# Altium PCB lps_regulator_rev_12.PcbDoc (part 2 of 2)
Units mil, origin at the board's own origin, x right, y up, seen from the top; angles counter-clockwise.
Board outline 5361 x 2466 mil, 2 copper layers (Top Layer, Bottom Layer); 131 components, 55 nets, 348 pads, 196 vias.
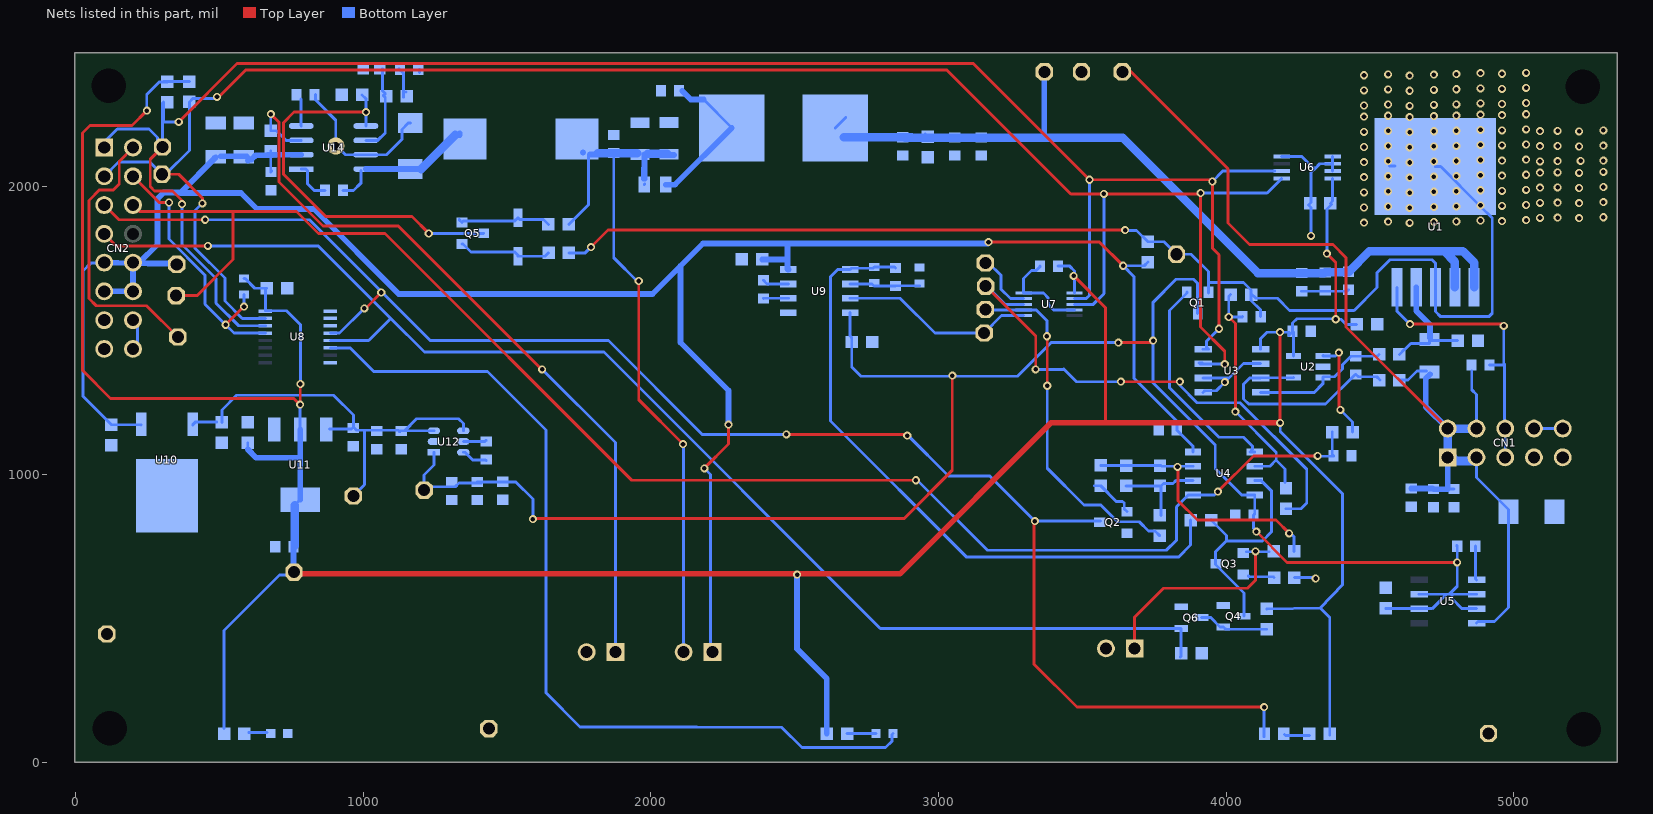
[diagram p2: the nets of this part, all layers, seen from the top]

## Via types
v1: diameter 28, hole 16, Top Layer to Bottom Layer, 196 vias

## Nets (pads, with @x,y where several pads share a name; then routed paths per layer and width w, separated by ;. In a path a pad name is that pad's centre, name@x,y a point inside that pad or via, vN(x,y) a via of type N, cw(c..) or ccw(c..) an arc to the next point about the centre after c; other vN are vias at no path point)
3V3: 3V3.1 C2.1 C7.1 C14.1 C15.1 C16.1 C23.1 C28.1 R6.1 R7.1 R15.2 R19.1 R25.1 R28.1 R31.1 U2.5 U3.5 U6.8 U7.1 U8.16 U11.2 U11.4 | length 11907.7
  Top Layer w10: v1(248,2265) 197,2214 50,2214 24,2188 24,1363 122,1265 759,1265 v1(781,1243) 781.5,1243.5 781.5,1314.5 v1(782,1315) ; v1(3470,1691) 3580,1581 3580,1182.12 ; 3580,1180 3580,1182.12 ; 3582,1180.12 3580,1182.12 ; v1(4187.15,1495) 4187.15,1180.85 v1(4187.88,1180.12) ; v1(4350,1768) 4381,1737 v1(4381,1540)
  Top Layer w20: 3V3.1@760,661 766,655 2866,655 3391,1180 3580,1180 ; 3582,1180.12 v1(4187.88,1180.12)
  Bottom Layer w10: v1(248,2265) 248,2321.12 292.31,2365.43 R6.1@319,2365.43 ; R6.1@306,2366.43 R7.1@396,2366.43 ; R25.1@516.57,118 516.57,458.57 709,651 750,651 3V3.1@760,661 3V3.1@757.5,663.5 ; R15.2@586,1681.56 589.94,1681.56 623.5,1648 C16.1@664.57,1648 661,1644.43 661,1569.57 733.43,1569.57 782,1521 v1(782,1315) ; 599,1088 C23.1@599,1110.57 ; C28.1@757.5,749 762,753.5 C28.1@770.21,761.72 ; U11.4@762,893.95 U11.4@781,912.95 ; 778,1059 781,1062 ; U11.2@781,1157.05 v1(781,1243) ; C15.1@3415.38,1724.56 3456.32,1724.56 3472.88,1708 U7.1@3472.88,1631.37 ; U3.5@4120,1436 4120,1473 4142,1495 v1(4187.15,1495) 4218.29,1495 4218.29,1483.31 4231.01,1496.03 C14.1@4231.01,1498 ; R28.1@4141,533.43 4327.43,536.43 4405,617.45 4405,933 4187.88,1150.12 v1(4187.88,1180.12) ; U2.5@4234,1412.4 4234,1495.01 C14.1@4231.01,1498 ; 4329.93,533.93 4360,503.87 R19.1@4360,100 R19.1@4360,94 ; v1(4350,1768) 4350,1923.43 4366,1939.43 C7.1@4362.43,1943 4370.17,1950.73 U6.8@4370.17,2029.41 ; C2.1@4453.57,1522 4417.26,1522 4399.26,1540 v1(4381,1540) 4379,1542 4246,1542 4231.01,1527.01 C14.1@4231.01,1498
  Bottom Layer w20: 599,1088 628,1059 778,1059 ; 3V3.1@757.5,663.5 C28.1@757.5,749 ; U11.4@781,912.95 781,1062 U11.2@781,1157.05 ; v1(2508.5,652.5) 2508.5,394.5 2611.57,291.43 R31.1@2611.57,100
  Bottom Layer w30: C28.1@762,753.5 U11.4@762,893.95
+5V0: +5V0.1 C21.1 C22.1 C25.1 C27.1 U10.3 U11.3 U12.3 U12.4 | length 1542.6
  Bottom Layer w10: U10.3@407.9,1173.09 418.3,1183.5 C21.1@491,1183.5 ; C21.1@509,1181.43 509,1225 560,1276 897,1276 966,1207 C22.1@966,1165.87 ; U11.3@883.55,1159.05 959.18,1159.05 C22.1@966,1165.87 ; +5V0.1@966,926 1005,965 1005,1154.4 ; C25.1@1121.6,1154.4 1005,1154.4 ; C25.1@1127,1149 1130.4,1152.4 C25.1@1144.4,1152.4 ; U12.3@1246,1152.4 C25.1@1144.4,1152.4 ; U12.4@1348.36,1152.4 1348.36,1177.64 1332,1194 1186,1194 C25.1@1144.4,1152.4 ; C22.1@966,1165.87 977.46,1154.4 1005,1154.4
+VIN_SW: +VIN_SW.1 C4.1 C18.1 C24.1 C33.1 C34.1 C35.1 CN2.5 CN2.6 CN2.13 CN2.14 CN3.1 R5.1 R29.1 U4.8 U9.8 U10.1 U14.2 | length 8141.4
  Top Layer w10: v1(2186,1022) 2270,1106 v1(2270,1174) ; v1(3174,1808) 3560,1808 v1(3642,1726)
  Top Layer w20: +VIN_SW.1@352,1744 +VIN_SW.1@357.75,1749.75
  Bottom Layer w10: CN2.5@100,1735 53,1735 26,1708 26,1272.43 C24.1@125,1173.43 228.03,1173.43 U10.1@228.37,1173.09 ; CN2.13@200,1735.03 CN2.13@200,1737 CN2.13@222,1737 ; +VIN_SW.1@352,1731 +VIN_SW.1@352,1734 ; C35.1@479,2104.94 C35.1@487,2104.94 ; R29.1@679,2124.57 679,2112 679,2110.5 679,2052.5 C33.1@680,2051.5 ; C33.1@682,2055.5 C33.1@682.5,2056 ; v1(2186,1022) 2208,1000 2208,389 CN3.1@2214,383 ; 2470,1748 2475,1743 ; R5.1@3728,1738.57 3715.43,1726 v1(3642,1726) 3679,1689 3679,1336 3828.5,1186.5 C4.1@3828.5,1155 3884.72,1098.78 U4.8@3884.72,1079
  Bottom Layer w20: CN2.6@100,1637 CN2.14@200,1637 200,1735.03 221.95,1734.59 252,1734 +VIN_SW.1@352,1734 ; CN2.5@100,1737 CN2.13@199.96,1735.03 ; CN2.13@222,1737 285,1800 285,1959 307,1981 366,1981 C35.1@488,2103 ; 365,1979 575,1979 631,1923 829,1923 1124,1628 2006,1628 2103,1725 ; C35.1@505,2107 C34.1@595,2107 ; C34.1@599.57,2092 C34.1@605.15,2097.59 ; C34.1@612.15,2095.59 627.07,2110.5 679,2110.5 R29.1@685,2110.5 ; R29.1@667.5,2112 679,2112 U14.2@785,2112 ; v1(2270,1174) 2270,1292 2103,1459 2103,1725 ; C18.1@2387,1748 2470,1748 ; U9.8@2478.43,1713 2476.81,1713 2475,1714.81 2475,1743 2475,1803 ; v1@3171,1803 2475,1803 ; 2103,1725 2181,1803 2475,1803
-5V0: -5V0.1 C5.1 C19.2 C26.1 C29.2 C50.1 Q1.3 R24.2 R32.1 U4.4 U5.2 U5.3 U5.6 U5.7 U9.4 U12.1 | length 6550.2
  Top Layer w10: v1(1590,845) 1593,848 1896,848 2881,848 3048,1015 v1(3048,1344) ; v1(3625,1459) 3739.62,1459 v1(3746.31,1465.69) ; v1(4105,802) 4212,695 v1(4803,695)
  Bottom Layer w10: U12.1@1246,1077.6 1246,1033 1212,999 -5V0.1@1212,946 1223.78,957.78 1320.28,957.78 1333,970.5 C26.1@1410.94,970.5 ; C26.1@1396,974.43 1397,974.43 1530.57,974.43 1590,915 v1(1590,845) ; U9.4@2693,1563 2693,1481.57 2698.57,1476 C19.2@2698.57,1461 2698.57,1374.43 2731,1342 3275,1342 3392,1459 v1(3625,1459) ; Q1.3@3901,1559.44 3901,1664 3886,1679 3826,1679 3746.31,1599.31 v1(3746.31,1465.69) 3746.31,1318.69 3962,1103 3962,1021 4054,929 U4.4@4099.28,929 4099.28,863.79 C5.1@4094.5,859 4094.5,812.5 v1(4105,802) ; C29.2@4555,535.57 4556.57,534 U5.6@4670.61,534 4716.17,534 4766.17,584 ; U5.7@4670.61,584 4766.17,584 ; R24.2@4801.56,753 R24.2@4803.11,751.44 4803.11,611.72 4775.39,584 ; U5.3@4870.61,534 4820.05,534 4784.61,569.44 4784.61,584 ; U5.2@4870.61,584 4784.61,584 ; 4766.17,584 4775.39,584 ; 4775.39,584 4784.61,584
/INT: CN2.10 R15.1 U8.13 | length 951.9
  Top Layer w10: CN2.10@200,2037 291,1946 v1(325,1946) ; v1(522,1521) 585,1584 v1(586,1584)
  Bottom Layer w10: v1(325,1946) 325,1818.56 450.5,1693.06 450.5,1592.5 v1(522,1521) 551.2,1491.8 U8.13@660,1491.8 ; v1(586,1584) R15.1@586,1626.44
/RST: CN2.9 TP1.1 | length 981.1
  Top Layer w10: CN2.9@200,2137 152,2089 152,2010 132,1990 83.86,1990 47,1953.14 47,1612 72,1587 247,1587 TP1.1@356,1478
Current_Limit: CN2.3 LED2.2 Q2.3 U8.4 | length 5634.5
  Top Layer w10: CN2.3@100,1937 151,1886 v1(451,1886) ; v1(1004,1578) 1008,1578 v1(1063,1633) ; v1(2471,1140) 2887,1140 v1(2891.5,1135.5) ; v1@3332,838 3332,341 3481,192 v1(4132,192)
  Bottom Layer w10: CN2.3@100,1937 CN2.3@109,1937 ; v1(451,1886) 813,1886 1233,1466 1853,1466 2179,1140 v1(2471,1140) ; U8.4@886,1491.8 917.8,1491.8 v1(1004,1578) ; v1@2893,1137 3035,995 3178,995 v1(3335,838) 3335.5,838.5 3512.54,838.5 3513.04,839 Q2.3@3563.32,839 ; 3513.04,838 3522,838 ; LED2.2@4131,89 4132,90 4132,190 4131,191 v1(4132,192)
Debug_LED: LED3.2 U8.6 | length 3100.8
  Bottom Layer w10: U8.6@886,1440.61 955,1440.61 1036.81,1358.81 1432.19,1358.81 1635.5,1155.5 1635.5,241.5 1754,123 2161,123 2162,122 2454,122 2525,51 2816,51 2839,74 2839,96.94 LED3.2@2842.06,100
GND: C2.2 C3.2 C4.2 C5.2 C6.2 C7.2 C8.2 C9.2 C10.2 C11.2 C12.2 C13.2 C14.2 C15.2 C16.2 C18.2 C19.1 C21.2 C22.2 C23.2 C24.2 C25.2 C26.2 C27.2 C28.2 C29.1 C32.2 C33.2 C34.2 C35.2 C37.2 C38.2 C39.2 C41.1 C42.2 C43.2 C44.2 C45.2 C46.2 C50.2 CN1.4 CN1.5 CN1.9 CN1.10 CN2.7 CN2.8 CN2.15 CN2.16 CN4.2 CN5.2 D1.1 D3.1 GND3.1 GND4.1 GND5.1 GND.1 LED1.2 Q2.2 Q4.2 Q6.2 R13.1 R18.2 R20.2 R22.2 R27.2 R32.2 U2.2 U3.1 U3.2 U3.6 U6.4 U6.5 U6.6 U6.7 U7.4 U7.10 U8.1 U8.2 U8.3 U8.8 U9.5 U10.4 U11.1 U12.2 U14.7 U14.9 | length 2171.2
  Top Layer w10: CN2.8@110,1436 CN2.8@112.44,1433.56
  Bottom Layer w10: CN2.16@215,1437 CN2.15@215,1537 ; C39.2@835,2321 835,2302 905,2232 U14.9@905,2142 908.64,2142 938.64,2112 U14.7@1009.41,2112 1081,2112 1135,2166 1135,2200.04 1156.96,2222 D3.1@1164.46,2222 ; R18.2@1195.43,2398.03 R18.2@1195.43,2409 ; C15.2@3352.39,1724.56 3352.39,1722.59 3339.67,1709.87 3323.76,1709.87 3295.72,1681.83 U7.10@3295.72,1631.37 3364.51,1631.37 3380.88,1615 3380.88,1592 3400.57,1572.32 U7.4@3472.88,1572.32 ; U3.1@3920,1286 3925.5,1291.5 3965.5,1291.5 v1(3995.5,1321.5) 4010,1336 ; U3.2@3920,1336 4010,1336 ; U3.6@4120,1386 4060,1386 4010,1336 ; U6.4@4193,2106.18 4262.82,2106.18 4303.7,2065.3 4310.3,2065.3 ; R22.2@4237.43,642 v1@4311,642 ; C10.2@4262.49,1637.5 4420,1637.5 C12.2@4425,1642.5 ; v1(4295,1830) 4295,1928.43 4286,1937.43 C7.2@4291.57,1943 4295,1946.43 4295,2050 4310.3,2065.3 ; U6.7@4370.17,2055 U6.5@4370.17,2080.59 ; U6.6@4370.17,2106.18 U6.5@4370.17,2080.59 ; CN1.9@5070,1160 CN1.10@5170,1160 ; 4310.3,2065.3 4325.59,2080.59 U6.5@4370.17,2080.59
  other v1: 4311,639
I2C_SCL: CN2.1 I2C_SCL.1 R6.2 U3.4 U6.2 U7.2 U8.14 | length 6626.7
  Top Layer w10: I2C_SCL.1@302.5,2138.57 260,2096.07 260,2001 275,1986 337,1986 372,1951 372,1942 v1(370.5,1940.5) v1@369,1939 ; v1(359,2226) 562,2429 3121,2429 v1(3525,2025) 3946,2025 v1(3952,2019) 3952,1787 3975,1764 v1(3975,1507)
  Bottom Layer w10: CN2.1@100,2135 CN2.1@101,2136 ; CN2.1@100,2137 100,2156 145.5,2201.5 255.5,2201.5 285.5,2171.5 285.5,2155.57 I2C_SCL.1@302.5,2138.57 302.5,2292.07 306,2295.57 306,2226 v1(359,2226) ; v1(370.5,1940.5) 370.5,1799.87 489,1681.37 489,1596 567.61,1517.39 U8.14@660,1517.39 ; U7.2@3472.88,1611.69 3513.45,1611.69 3519,1617.23 ; 3519.23,1617.46 3525,1623.23 v1(3525,2025) ; U3.4@3920,1436 3939,1436 3931,1444 3931,1463 v1(3975,1507) ; v1(3952,2019) 3988,2055 U6.2@4169,2055
I2C_SDA: CN2.2 I2C_SDA.1 R7.2 U3.3 U6.1 U7.3 U8.15 | length 6533.7
  Top Layer w10: I2C_SDA.1@301,2044 359,2044 441,1962 v1(441,1943) ; v1(492,2313) 498,2313 592,2407 3029,2407 3460,1976 v1(3575,1976) 3908,1976 v1(3911,1979) 3911,1513 3995,1429 v1(3995,1384)
  Bottom Layer w10: CN2.2@100,2037 150,2087 258,2087 I2C_SDA.1@301,2044 313,2044 396,2127 R7.2@396,2295.57 407.43,2307 486,2307 v1(492,2313) ; v1(441,1943) 416,1918 416,1787 520,1683 520,1603 580.02,1542.98 U8.15@660,1542.98 ; U7.3@3472.88,1592 3538,1592 3575,1629 v1(3575,1976) ; v1(3911,1979) 4142.59,1979 U6.1@4193,2029.41 ; U3.3@3920,1386 3917.5,1388.5 3905.5,1388.5 3910,1384 v1(3995,1384)
I_Sample: C6.1 CN2.11 I_sample.1 R11.2 U4.5 | length 5428.2
  Top Layer w10: CN2.11@200,1937 222,1915 548,1915 ; I_sample.1@350,1622 422,1622 548,1748 548,1915 ; v1(2921.5,980.5) 1933.5,980.5 1076,1838 845,1838 768,1915 548,1915 ; v1(3971,941) 4095,1065 v1(4318,1065)
  Bottom Layer w10: I_sample.1@348.5,1620.5 I_sample.1@350,1622 351.5,1623.5 I_sample.1@356.5,1623.5 ; I_sample.1@354,1616 359,1621 376,1621 371,1616 I_sample.1@359,1616 ; v1@2924,983 3170,737 3792,737 3827,772 3827,888.02 3867.98,929 U4.5@3884.72,929 3959,929 v1(3971,941) ; v1(4318,1065) 4318.97,1064.03 4373.01,1064.03 C6.1@4373.01,1066 4368.57,1070.44 R11.2@4368.57,1148
IA_TP: IA_TP.1 R17.1 U7.7 | length 1264.1
  Top Layer w10: IA_TP.1@3149.95,1561.07 IA_TP.1@3162.88,1574 ; IA_TP.1@3157,1576 IA_TP.1@3166.93,1585.93 ; v1(3377,1481) 3378,1480 v1(3378,1309)
  Bottom Layer w10: IA_TP.1@3162.88,1574 3164.57,1572.32 U7.7@3295.72,1572.32 3339.69,1572.32 3377,1535 v1(3377,1481) ; v1(3378,1309) 3378,1022 3506,894 3564,894 3622,836 3698,836 3729.78,804.22 3752.35,804.22 R17.1@3769,787.57
NetC1_1: C1.1 R4.1 R13.2 U9.2 | length 244.3
  Bottom Layer w10: U9.2@2693,1663 2769.22,1663 2776.72,1655.5 C1.1@2850.72,1655.5 2851.78,1656.57 R13.2@2933.72,1656.57
NetC17_1: C17.1 U12.5 | length 81.5
  Bottom Layer w10: U12.5@1348.36,1115 1423.57,1115 C17.1@1428,1119.43
NetC17_2: C17.2 U12.6 | length 91.7
  Bottom Layer w10: U12.6@1348.36,1077.6 1354.52,1077.6 1381.12,1051 1425.57,1051 C17.2@1428,1048.57
NetC30_1: C30.1 R16.1 R21.2 R30.2 U4.7 | length 953.6
  Top Layer w10: v1@3833,1032 3833,909 3900,842 4173,842 v1(4219,796)
  Bottom Layer w10: R30.2@3564,1032 3564.57,1031.43 C30.1@3652,1031.43 3774,1031.43 3776.43,1029 v1@3829,1029 ; v1(3831,1027) v1@3829,1029 ; U4.7@3884.72,1029 v1@3829,1029 ; v1(4219,796) 4223.81,796 4236.43,783.38 R16.1@4236.43,733
NetC30_2: C30.2 R17.2 R21.1 U4.6 | length 342.9
  Bottom Layer w10: C30.2@3652,960.57 R21.1@3774,960.57 ; R17.2@3773,858.43 3774,859.43 R21.1@3774,960.57 ; U4.6@3884.72,979 3825,979 3815,969 3782.43,969 R21.1@3774,960.57
NetC31_1: C31.1 R10.1 U2.3 U3.8 | length 487.7
  Bottom Layer w10: U3.8@4120,1286 4306,1286 4336,1316 U2.3@4336,1337.6 4338.4,1340 4377,1340 4404,1367 4404,1382 4433.5,1411.5 C31.1@4451,1411.5 4525.06,1411.5 R10.1@4531.57,1418
NetC31_2: C31.2 R26.1 U2.4 U3.7 | length 767.5
  Bottom Layer w10: U2.4@4234,1337.6 4233.2,1336.8 4120.8,1336.8 U3.7@4120,1336 4082,1336 4060,1314 4060,1263.36 4078.36,1245 4345.53,1245 4449.03,1348.5 C31.2@4451,1348.5 4459.5,1340 4523.57,1340 R26.1@4534.57,1329
NetC32_1: C32.1 C37.1 C38.1 CN3.2 FB1.1 L1.2 R2.1 | length 2542.1
  Top Layer w10: v1(1958,1673) 1958,1260 v1(2112,1106)
  Bottom Layer w10: R2.1@1715,1870 1783,1938 1783,2107.12 L1.2@1788.88,2113 ; C32.1@1871,2117.5 1871,2116.5 1871,1754 v1@1954,1671 ; FB1.1@1977.2,2008 FB1.1@1979,2009.8 ; C37.1@2058.44,2109.32 2060,2110.88 C37.1@2063,2113.88 ; CN3.2@2114,383 v1@2114,1101
  Bottom Layer w20: L1.2@1764.13,2119.52 L1.2@1764.19,2119.57 ; L1.2@1788.88,2113 1819.5,2113 L1.2@1816,2116.5 ; FB1.1@1975.78,2028.88 1977.65,2111.53 1977.69,2113.2 1977.7,2112.13 FB1.1@1979,2028.8 ; C37.1@2060,2110.88 C37.1@2081,2110.88
  Bottom Layer w30: L1.2@1816,2116.5 1871,2116.5 C38.1@1953,2116.5 ; C38.1@1989,2114.88 C37.1@2056.44,2114.88
NetC36_1: C36.1 U14.1 | length 139.6
  Bottom Layer w10: U14.1@785,2062 801.16,2062 806,2057.16 806,2012 830,1988 C36.1@867.5,1988
NetC36_2: C36.2 D3.2 L1.1 U14.8 | length 504.9
  Bottom Layer w10: C36.2@930.5,1988 967,1988 992,2013 U14.8@992,2057.53 ; L1.1@1336,2180.53 L1.1@1340.47,2185
  Bottom Layer w20: U14.8@1009.41,2062 D3.2@1164.46,2062 D3.2@1202,2062 ; L1.1@1320.53,2180.53 1336,2180.53 L1.1@1336,2187
  Bottom Layer w30: D3.2@1202,2062 L1.1@1320.53,2180.53
NetC39_1: C39.1 U14.4 | length 94.6
  Bottom Layer w10: C39.1@783.57,2306 783.57,2213.43 U14.4@785,2212
NetC40_1: C40.1 C41.2 U14.6 | length 302.3
  Bottom Layer w10: U14.6@1009.41,2162 1051,2162 1077,2188 1077,2311 C40.1@1070,2318 ; C41.2@1067.54,2411 1067.54,2334.46 C40.1@1075,2327 ; C40.1@1076,2322 C40.1@1076,2326
NetC40_2: C40.2 R18.1 | length 105.6
  Bottom Layer w10: R18.1@1124.5,2411 1140.43,2395.07 C40.2@1140.43,2312
NetC42_1: C42.1 FB1.2 L2.1 | length 537
  Bottom Layer w10: L2.1@2183.97,2304 2281,2206.97 L2.1@2281,2205
  Bottom Layer w20: FB1.2@2052,2008 2084,2008 L2.1@2281,2205 ; C42.1@2109.14,2334 2139.14,2304 L2.1@2183.97,2304
NetC47_1: C47.1 Q1.2 R5.2 R8.1 R14.2 TP6.1 U1.3 U1.6 | length 4431
  Top Layer w10: v1(1792,1791) 1851,1850 v1(3649,1850)
  Bottom Layer w10: R14.2@1715.43,1771 1772,1771 v1(1792,1791) ; v1(3649,1850) 3650,1849 3688.43,1849 R5.2@3728,1809.43 3783.57,1809.43 TP6.1@3827,1766 3878,1766 3938.4,1705.6 3938.4,1662.4 ; Q1.2@3938.4,1631.29 Q1.2@3938.4,1634.24 3938.4,1662.4 ; C47.1@4119.99,1549 4119.99,1572.01 4086.43,1605.57 R8.1@4086.43,1626 R8.1@4086.43,1630 ; U1.6@4568,2072.29 U1.6@4586.7,2072.29 ; U1.6@4727,2071 4745.7,2071 4882.42,1934.28 4925,1891.7 4925,1561 4913,1549 4746,1549 4728,1567 U1.3@4728,1651 4728,1735 4716,1747 4569,1747 4524,1702 4524,1650 4445,1571 4220,1571 4178,1613 4103.43,1613 R8.1@4086.43,1630 ; 3938.4,1662.4 3944,1668 4060,1668 4086.43,1641.57 R8.1@4086.43,1630
  other v1: 4638,1874.86 4479,1876.14 4722,1878.14 4563,1879.43 4800,1880 4959,1881.43 4884,1883.29 5043,1884.71 5227,1891.29 5091,1892.29 5152,1893.14 5311,1894.57 4638,1927.43 4479,1928.71 4722,1930.71 4563,1932 4800,1932.57 4959,1934 4884,1935.86 5043,1937.29 5227,1943.86 5091,1944.86 5152,1945.71 5311,1947.14 4638,1980 4479,1981.29 4722,1983.29 4563,1984.57 4800,1985.14 4959,1986.57 4884,1988.43 5043,1989.86 5227,1996.43 5091,1997.43 5152,1998.29 5311,1999.71 4638,2032.57 4479,2033.86 4722,2035.86 4563,2037.14 4800,2037.71 4959,2039.14 4884,2041 5043,2042.43 5227,2049 5091,2050 5152,2050.86 5311,2052.29 4638,2085.14 4479,2086.43 4722,2088.43 5091,2089 4563,2089.71 4800,2090.29 5152,2089.86 5232,2090.57 5311,2091.29 4959,2091.71 4884,2093.57 5043,2095 4638,2137.71 4479,2139 4722,2141 5227,2140.57 4563,2142.29 5091,2141.57 5152,2142.43 4800,2142.86 4959,2144.29 5311,2143.86 4884,2146.14 5043,2147.57 4638,2190.29 4479,2191.57 5227,2193.14 4722,2193.57 5091,2194.14 4563,2194.86 4800,2195.43 5152,2195 5311,2196.43 4959,2196.86 4884,2198.71 5043,2200.14 4638,2242.86 4479,2244.14 4722,2246.14 4563,2247.43 4800,2248 4959,2249.43 4884,2251.29 5043,2252.71 4638,2281.86 4479,2283.14 4722,2285.14 4563,2286.43 4800,2287 4959,2288.43 4884,2290.29 5043,2291.71 4638,2334.43 4479,2335.71 4722,2337.71 4563,2339 4800,2339.57 4959,2341 4884,2342.86 5043,2344.29 4638,2387 4479,2388.29 4722,2390.29 4563,2391.57 4800,2392.14 4959,2393.57 4884,2395.43 5043,2396.86
NetC47_2: C47.2 R8.2 R9.1 U4.2 | length 868.3
  Top Layer w10: v1(4009,1548) 4032,1525 v1(4032,1219)
  Bottom Layer w10: R8.2@4015.57,1626 4009,1619.43 v1(4009,1548) 4056,1548 C47.2@4057,1549 ; v1(4032,1219) 4174,1077 4174,1051 ; U4.2@4099.28,1029 4152,1029 4173.5,1050.5 4204,1020 R9.1@4204,972.43
NetCN1_3: CN1.3 CN1.8 R1.2 U1.5 | length 982.6
  Top Layer w10: v1@4644,1524 4958,1524 v1(4965,1517)
  Bottom Layer w10: U1.5@4594,1651 4594,1568 v1(4639,1523) ; R1.2@4915.5,1381 4964.21,1381 4967.21,1384 ; v1(4965,1517) 4965,1386.21 4967.21,1384 ; CN1.3@4970,1060 CN1.8@4970,1160 4967.21,1162.79 4967.21,1384
NetCN4_1: CN4.1 R29.2 U14.3 | length 2698.4
  Top Layer w10: v1(679,2253) 707,2225 707,2017 860,1864 1122,1864 1620,1366 v1(1622.25,1366)
  Bottom Layer w10: v1(679,2253) R29.2@679,2195.43 698.57,2195.43 732,2162 U14.3@785,2162 ; v1(1622.25,1366) 1877,1111.25 CN4.1@1877,383
NetCN5_1: CN5.1 Q3.1 R16.2 | length 760.7
  Top Layer w10: CN5.1@3682,396 3682,505 3782,605 4074,605 4102,633 v1(4102,733)
  Bottom Layer w10: Q3.1@4069.84,732 R16.2@4148.57,732
NetD2_1: D2.1 Q5.1 R14.1 | length 325.4
  Bottom Layer w10: Q5.1@1343.76,1801.6 1346.71,1801.6 1375,1773.31 1527.25,1773.31 1538,1762.56 D2.1@1538,1759.07 1632.64,1759.07 R14.1@1644.57,1771
NetD2_2: D2.2 Q5.2 R2.2 | length 330.6
  Bottom Layer w10: Q5.2@1333.98,1886.18 Q5.2@1343.76,1876.4 1349.54,1882.18 1527.25,1882.18 D2.2@1538,1892.93 1544.28,1886.65 1627.48,1886.65 R2.2@1644.13,1870
NetLED1_1: LED1.1 R25.2 | length 63.5
  Bottom Layer w10: R25.2@602.43,103 LED1.1@665.94,103
NetLED2_1: LED2.1 R19.2 | length 87.8
  Bottom Layer w10: LED2.1@4202.96,97.04 4207,93 R19.2@4289.13,93
NetLED3_1: LED3.1 R31.2 | length 100.6
  Bottom Layer w10: R31.2@2682.43,100 LED3.1@2783,100
NetQ1_1: Q1.1 U4.1 | length 769.9
  Bottom Layer w10: Q1.1@3863.6,1634.24 3863.6,1631.29 3803,1570.69 3803,1302 3975,1130 4060.45,1130 4090.92,1099.53 4090.92,1087.37 4082.55,1079 U4.1@4099.28,1079
NetQ2_1: Q2.1 R30.1 | length 161.8
  Bottom Layer w10: R30.1@3542.51,961.13 R30.1@3564,961.13 3618.13,907 3640,907 3645.86,901.14 3645.86,880.79 Q2.1@3655.24,871.4
NetQ3_2: Q3.2 R22.1 | length 92.3
  Bottom Layer w10: Q3.2@4076.82,648.18 4080.13,644.87 4163.7,644.87 R22.1@4166.57,642
NetQ3_3: Q3.3 Q4.3 R12.2 U4.3 | length 798.8
  Bottom Layer w10: R12.2@3947.43,842 4001,788.43 4001,769 ; Q4.3@4061.43,508 4062,508.57 4062,589 3963,688 3963,732 4000,769 4001,769 ; U4.3@4099.28,979 4122,979 4157,944 4157,800 4126,769 4001,769
NetQ4_1: Q4.1 Q6.3 R28.2 | length 243.3
  Bottom Layer w10: Q6.3@3914.43,503 3946.35,503 3978.76,470.6 Q4.1@3990.57,470.6 3998.6,462.57 R28.2@4141,462.57
NetQ5_3: Q5.3 R27.1 U14.5 | length 1376.1
  Top Layer w10: v1(1010,2260) 760,2260 723,2223 723,2044 870,1897 1170,1897 v1@1228,1839
  Bottom Layer w10: R27.1@996.43,2320 1010,2306.43 v1(1010,2260) 1010,2212.59 U14.5@1009.41,2212 ; v1(1228,1838) 1417.56,1838 Q5.3@1418.56,1839
NetR11_1: R11.1 U2.1 | length 358.3
  Top Layer w10: v1(4392,1424) 4392,1230 v1(4397,1225)
  Bottom Layer w10: U2.1@4337.3,1413.7 U2.1@4336,1412.4 4380.4,1412.4 v1(4392,1424) ; v1(4397,1225) 4439.43,1182.57 R11.1@4439.43,1148
NetR23_1: R23.1 U9.6 | length 86.9
  Bottom Layer w10: R23.1@2391.72,1612.5 2392.21,1613 U9.6@2478.43,1613
NetR23_2: R23.2 U9.7 | length 91.9
  Bottom Layer w10: R23.2@2391.72,1675.5 2404.21,1663 U9.7@2478.43,1663
NetR24_1: R24.1 U5.1 | length 119.3
  Bottom Layer w10: R24.1@4866.11,751.44 4866.11,638.5 U5.1@4870.61,634
NetSpare_1_1: Spare_1.1 U7.9 | length 212.4
  Bottom Layer w10: Spare_1.1@3162.88,1736 3173.88,1736 3217.88,1692 3217.88,1644 3250.2,1611.69 U7.9@3295.72,1611.69
OUTPUT_ENB: CN2.4 Q6.1 R20.1 U8.5 | length 4665.3
  Top Layer w10: CN2.4@100,1837 142,1795 v1(460,1795)
  Bottom Layer w10: CN2.4@100,1826 CN2.4@100,1837 ; v1(460,1795) 844,1795 1096,1543 ; U8.5@886,1466.2 1019.2,1466.2 1096,1543 ; R20.1@3840.57,366 3843.57,369 Q6.1@3843.57,465.6 2797.77,465.6 1837.37,1426 1213,1426 1096,1543
Pwr_Out: C3.1 C8.1 C9.1 CN1.1 CN1.2 CN1.6 CN1.7 D1.2 PWR_OUT.1 R1.1 R3.2 R26.2 U5.4 | length 3671.4
  Top Layer w10: PWR_OUT.1@3639,2386 3655,2402 3667,2402 4006,2063 4006,1875 4081,1800 4371,1800 4417,1754 4417,1513 CN1.6@4770,1160
  Bottom Layer w10: R26.2@4605.43,1329 4632,1329 4663,1360 R3.2@4696,1360 ; C9.1@4717.03,951.5 4719.03,949.5 C9.1@4721,949.5 ; 4770,949.5 C8.1@4792,949.5 ; 4853.5,1360 4853.5,1295 4870,1278.5 CN1.7@4870,1160 ; CN1.2@4870,1060 4870,1047.5 4870,989.5 4981,878.5 D1.2@4981,871 4981,537.76 4933,489.76 4876.37,489.76 U5.4@4870.61,484
  Bottom Layer w20: C3.1@4643,951.5 C9.1@4717.03,951.5 ; R3.2@4698.36,1338.28 4694,1333.91 4694,1236 CN1.6@4770,1160 ; R3.2@4701.5,1341.41 R3.2@4709,1348.91 ; C9.1@4721,949.5 4770,949.5 CN1.1@4770,1060
  Bottom Layer w30: CN1.1@4788.31,1060.21 4770,1078.53 CN1.6@4770,1160 CN1.7@4870,1160 ; 4803,1047.5 CN1.2@4870,1047.5
Pwr_Out_Sample: C13.1 R3.1 R10.2 U1.4 | length 422
  Bottom Layer w10: R10.2@4602.43,1418 4619.09,1434.65 4620.57,1434.65 4641.91,1456 4707,1456 R3.1@4707,1470.09 ; R3.1@4711.91,1466 C13.1@4804.57,1466
  Bottom Layer w20: U1.4@4661,1651 4661,1569 4709,1521 R3.1@4709,1475.88
REG_VIN: C10.1 C11.1 C12.1 C43.1 C44.1 C45.1 C46.1 L2.2 REG_IN.1 U1.1 U1.2 | length 3031.8
  Bottom Layer w10: L2.2@2641,2205 L2.2@2677.5,2241.5 ; C46.1@2954,2183.43 C46.1@2963,2174.43 ; 3359,2171.5 3368,2180.5 ; C11.1@4341.5,1700.5 C11.1@4344,1703
  Bottom Layer w20: 3368,2180.5 REG_IN.1@3368,2388
  Bottom Layer w30: L2.2@2670.5,2172.5 C44.1@2876,2172.5 2907,2172.5 ; C44.1@2883,2171 2954,2171 2976,2171 C45.1@3145,2171 ; 3086,2171.5 3359,2171.5 3639.76,2171.5 4110.76,1700.5 C10.1@4262.49,1700.5 C11.1@4341.5,1700.5 ; C11.1@4344,1703 4422.5,1703 C12.1@4425,1705.5 ; C12.1@4424,1703 4498,1777 4758,1777 ; U1.2@4795,1651 4795,1740 4758,1777 ; U1.1@4862,1651 4862,1737 4822,1777 4758,1777
V_offset_adj: OSA_TP.1 R9.2 U7.8 | length 1816.5
  Top Layer w10: OSA_TP.1@3163.88,1655 3165,1655 3338,1482 v1(3338,1366) ; v1@3631,1326 v1(3634,1323) v1(3839,1323)
  Bottom Layer w10: OSA_TP.1@3163.88,1655 3167.88,1655 3230.88,1592 U7.8@3295.72,1592 ; v1(3338,1366) 3434,1366 3435.5,1367.5 3480,1323 v1(3634,1323) ; v1(3839,1323) 3839,1309.44 3898.44,1250 4048.36,1250 4280,1018.36 4280,901 4260.57,881.57 R9.2@4208,881.57
VA_TP: U7.6 U9.3 VA_TP.1 | length 678
  Bottom Layer w10: U9.3@2693,1613 2866.72,1613 2987.72,1492 VA_TP.1@3158.88,1492 3219.51,1552.63 U7.6@3295.72,1552.63
VA_TP_GAIN: C1.2 R4.2 R12.1 U9.1 | length 2294.4
  Bottom Layer w10: C1.2@2850.72,1718.5 2847.65,1721.56 R4.2@2777,1721.56 2772.72,1717.28 2697.28,1717.28 U9.1@2693,1713 2650,1713 2625,1688 2625,1186 3098,713 3834,713 3876.57,755.57 R12.1@3876.57,842
pads on no net: CN2.12 U5.5 U5.8 U6.3 U7.5 U8.7 U8.9 U8.10 U8.11 U8.12
copper on no net:
  other v1: 408,709 4575,1178 3272,1725 1229,1921 1024,1939 2467,1982 2864,2010 1509,2038 1461,2258 1855,2327 2452,2330 1281,2338

## Polygon pours and split planes (outlines as drawn)
GND on Top Layer "top" (solid, remove dead copper, shelved, pour order 0): -2,0 5359,0 5359,2466 -2,2466
GND on Bottom Layer "bottom" (solid, remove dead copper, shelved, pour order 2): -2,1 5359,1 5359,2466 -2,2466

## Keep-outs
Keep-Out Layer:
  circle w10: c119,118 r110
  circle w10: c5243,115 r110
  circle w10: c5239,2348 r110
  circle w10: c116,2352 r110

## Other copper
Top Layer:
  rectangle net NetC47_1: 5104,1857 5353,2226
  rectangle net NetC47_1: 4060,1857 5113,2459
Bottom Layer:
  rectangle net Pwr_Out: 4712,1031 4919,1214
  rectangle net +VIN_SW: 55,1593 257,1771
  rectangle net NetC47_1: 5113,1855 5352,2227
  rectangle net NetC47_1: 4423,1855 5113,2460

## Silkscreen, mask and mechanical layers (free items; w line width, h text height)
Bottom Overlay:
  text "OC_DISABLE" at 3497,253 h25
  text "Lab Power Supply Regulator" at 1562,247 h50
  text "Rev E" at 1087,166 h50
  text "SW_BYPASS" at 2113,29 h25
Mechanical 1:
  lines w10: -2,2 -2,2463 5357,2463 5357,-5.21 1,0.14

## Text inside footprints (layer, text, board x,y; h text height)
CN1: Top Overlay "1" at 4692,1002 h25; Top Overlay "5" at 5162,965 h25; Top Overlay "10" at 5153,1232 h25; Top Overlay "6" at 4657,1154 h25
CN2: Bottom Overlay "9" at 180,2237 h25 r270; Bottom Overlay "16" at 180,1357 h25 r270; Bottom Overlay "8" at 62,1359 h25 r270; Bottom Overlay "1" at 35,2221 h25 r270
U2: Bottom Overlay "*" at 4385,1434 h50
U3: Bottom Overlay "1" at 3878,1217 h25
U5: Bottom Overlay "1" at 4920.61,674 h25
U6: Bottom Overlay "1" at 4170.17,2001 h25 r180
U7: Bottom Overlay "1" at 3463.04,1651.06 h25